# Altium PCB JacdacTopologyHubEc30 126.PcbDoc
Units mm, origin at the board's own origin, x right, y up, seen from the top; angles counter-clockwise.
Board outline 18 x 45 mm, 2 copper layers (Top Layer, Bottom Layer), stack 1.525 mm thick; 31 components, 20 nets, 135 pads, 9 vias.
Unrouted connection lines stored in the file: 41.
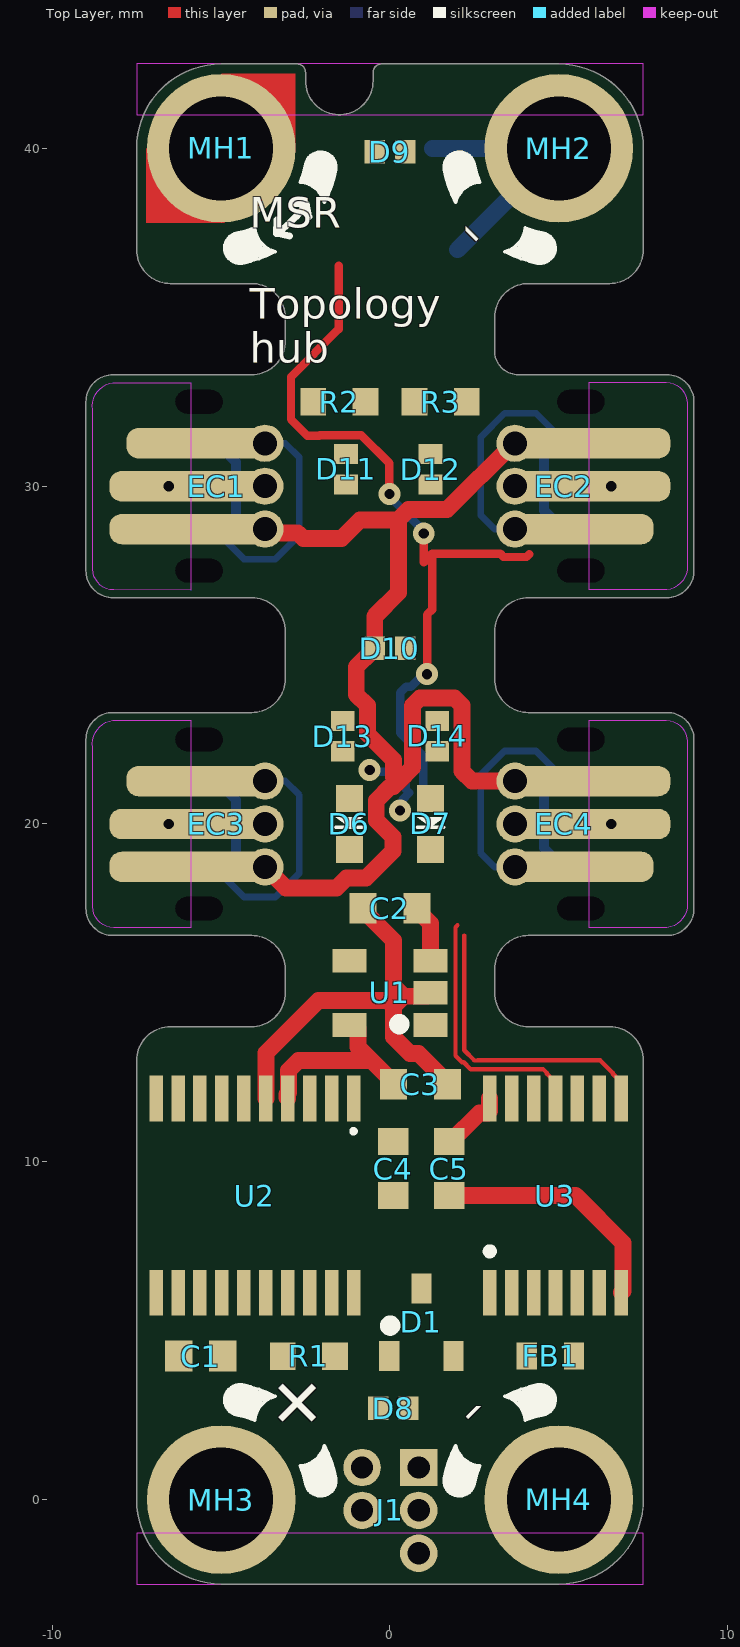
[diagram p0: Top Layer view]
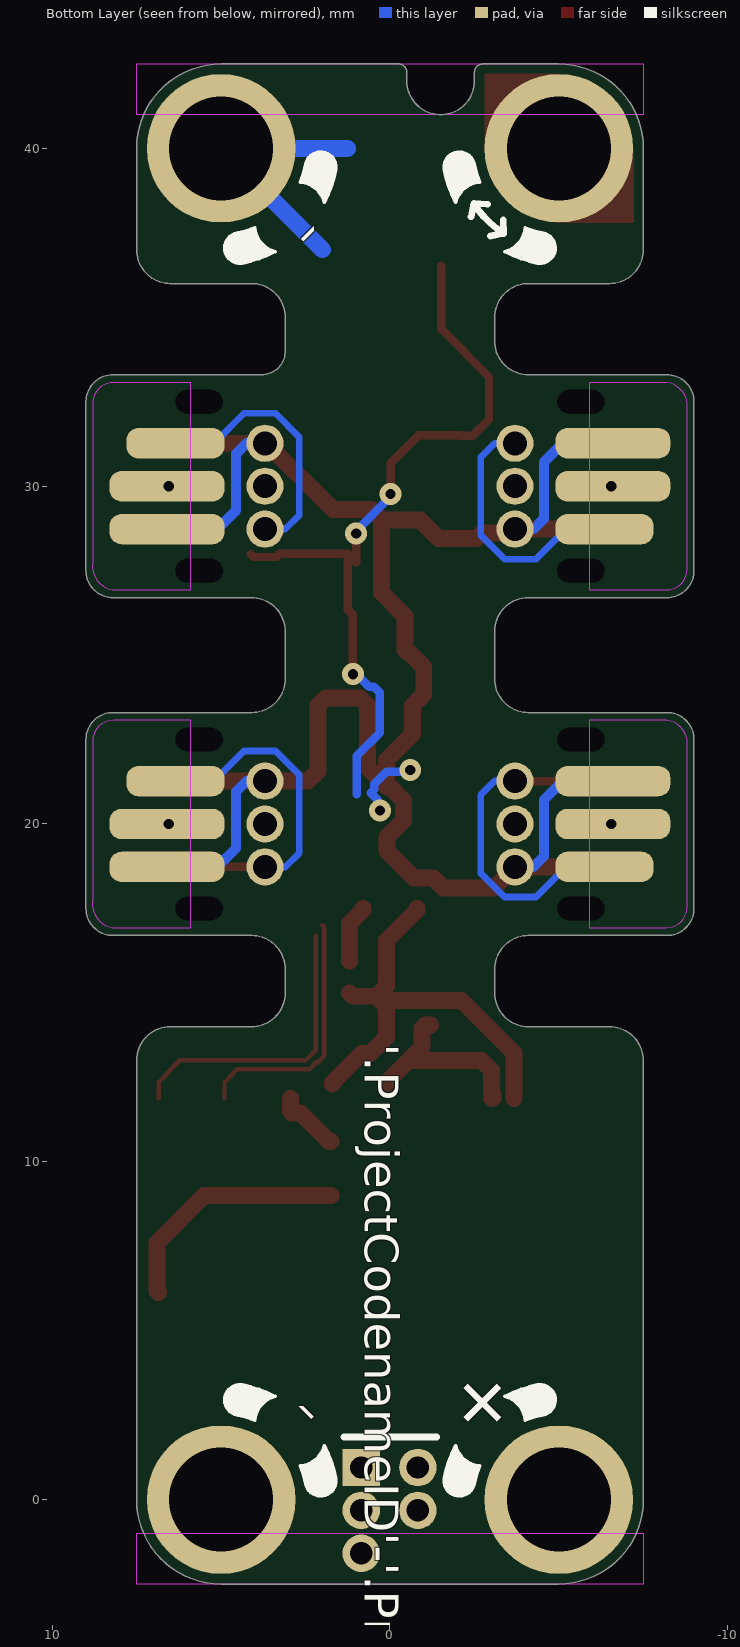
[diagram p1: Bottom Layer view, seen from below]

## Layer stack, top to bottom
Top Solder: solder mask 0.0102, Solder Resist, Dk 3.5
Top Layer: signal copper 0.0356
Dielectric 1: core 1.454, FR-4, Dk 4.2
Bottom Layer: signal copper 0.0356
Bottom Solder: solder mask 0.0102, Solder Resist, Dk 3.5

## Board outline
-7.5,13 cw(c-6.5,13) -6.5,14 -4.1,14 ccw(c-4.1,15) -3.1,15 -3.1,15.7 ccw(c-4.1,15.7) -4.1,16.7 -8.2,16.7 cw(c-8.2,17.5) -9,17.5 -9,22.5 cw(c-8.2,22.5) -8.2,23.3 -4.1,23.3 -4.098,23.3 ccw(c-4.098,24.3) -3.098,24.3 -3.1,24.3 -3.1,25.7 ccw(c-4.1,25.7) -4.1,26.7 -8.2,26.7 cw(c-8.2,27.5) -9,27.5 -9,32.5 cw(c-8.2,32.5) -8.2,33.3 -4.1,33.3 -4.098,33.3 ccw(c-4.098,34.3) -3.098,34.3 -3.1,34.3 -3.1,35 ccw(c-4.1,35) -4.1,36 -6.5,36 cw(c-6.5,37) -7.5,37 -7.5,36.97 -7.5,40 cw(c-5,40) -5,42.5 -2.75,42.5 cw(c-2.75,42.25) -2.5,42.25 -2.5,42 ccw(c-1.5,42) -0.5,42 -0.5,42.25 cw(c-0.25,42.25) -0.25,42.5 5,42.5 cw(c5,40) 7.5,40 7.5,36.97 7.5,37 cw(c6.5,37) 6.5,36 4.1,36 ccw(c4.1,35) 3.1,35 3.099,33.999 ccw(c3.797,33.999) 3.797,33.301 8.2,33.3 cw(c8.2,32.5) 9,32.5 9,27.5 cw(c8.2,27.5) 8.2,26.7 4.1,26.7 ccw(c4.1,25.7) 3.1,25.7 3.1,24.3 3.098,24.3 ccw(c4.098,24.3) 4.098,23.3 4.1,23.3 8.2,23.3 cw(c8.2,22.5) 9,22.5 9,17.5 cw(c8.2,17.5) 8.2,16.7 4.1,16.7 ccw(c4.1,15.7) 3.1,15.7 3.1,15 ccw(c4.1,15) 4.1,14 6.5,14 cw(c6.5,13) 7.5,13 7.5,0 cw(c5,0) 5,-2.5 -5,-2.5 cw(c-5,0) -7.5,0

## Design rules (kind name [scope] priority, off if disabled: settings)
AssemblyTestPointUsage [All] p1: valid=2
BoardOutlineClearance [not (HasFootprint('MOUSEBITE_CONNECTOR_3X2') or HasFootprint('MOUSEBITE_NOCONNECTOR_3'))] p1: gap=0.3 ignorepadtopadclearanceinfootprint=FALSE except(0: Arc-SplitContinuation Track-SplitContinuation SMDPad-SplitContinuation THPad-SplitContinuation Via-SplitContinuation Fill-SplitContinuation Poly-SplitContinuation Text-OutlineEdge Text-CavityEdge Text-CutoutEdge Text-SplitBarrior Text-SplitContinuation; 0.15: Region-OutlineEdge Region-CavityEdge Region-CutoutEdge Region-SplitBarrior Region-SplitContinuation)
Clearance "Clearance MH" [InComponent('MH1') OR InComponent('MH2') OR InComponent('MH3') OR InComponent('MH4')] p1: gap=0.15 ignorepadtopadclearanceinfootprint=FALSE except(0.254: Arc-Hole Track-Hole SMDPad-Hole THPad-Hole Via-Hole Fill-Hole Poly-Hole Region-Hole Text-Hole; 0.8: Arc-Fill Arc-Poly Arc-Region Track-Fill Track-Poly Track-Region SMDPad-Fill SMDPad-Poly SMDPad-Region THPad-Fill THPad-Poly THPad-Region Via-Fill Via-Poly Via-Region Fill-Fill Fill-Poly Fill-Region Poly-Poly Poly-Region Region-Region)
Clearance [All] p2: gap=0.13 ignorepadtopadclearanceinfootprint=FALSE except(0.25: Arc-Hole Track-Hole SMDPad-Hole THPad-Hole Via-Hole Fill-Hole Poly-Hole Region-Hole Text-Hole)
ComponentClearance "ComponentClearance MH" [InComponent('MH1') OR InComponent('MH2') OR InComponent('MH3') OR InComponent('MH4') vs InComponent('J1')] p1: gap=0 collisioncheckmode=3 verticalgap=0 showdistances=FALSE donotcheckwithout3dbody=TRUE
ComponentClearance [All] p2: gap=0.01 collisioncheckmode=3 verticalgap=0.2 showdistances=FALSE
DiffPairsRouting [All] p1: maxlimit=2 minlimit=0.15 mostfreqgap=0.15 toplayer_minwidth=0.15 toplayer_maxwidth=2 toplayer_prefwidth=0.15 bottomlayer_minwidth=0.15 bottomlayer_maxwidth=2 bottomlayer_prefwidth=0.15 substack1={CB9D278B-8BF5-444A-AAF4-837A2A9DF42D} toplayer_{cb9d278b-8bf5-444a-aaf4-837a2a9df42d}_minwidth=0.381 toplayer_{cb9d278b-8bf5-444a-aaf4-837a2a9df42d}_maxwidth=0.381 toplayer_{cb9d278b-8bf5-444a-aaf4-837a2a9df42d}_prefwidth=0.381 bottomlayer_{cb9d278b-8bf5-444a-aaf4-837a2a9df42d}_minwidth=0.381 bottomlayer_{cb9d278b-8bf5-444a-aaf4-837a2a9df42d}_maxwidth=0.381 bottomlayer_{cb9d278b-8bf5-444a-aaf4-837a2a9df42d}_prefwidth=0.381 substack2={826B8647-A721-4255-895A-19F9591B9CD1} toplayer_{826b8647-a721-4255-895a-19f9591b9cd1}_minwidth=0.381 toplayer_{826b8647-a721-4255-895a-19f9591b9cd1}_maxwidth=0.381 toplayer_{826b8647-a721-4255-895a-19f9591b9cd1}_prefwidth=0.381 bottomlayer_{826b8647-a721-4255-895a-19f9591b9cd1}_minwidth=0.381 bottomlayer_{826b8647-a721-4255-895a-19f9591b9cd1}_maxwidth=0.381 bottomlayer_{826b8647-a721-4255-895a-19f9591b9cd1}_prefwidth=0.381 substack3={E64FCAF4-1BC8-437D-B1E0-0E5F2DC0F59E} toplayer_{e64fcaf4-1bc8-437d-b1e0-0e5f2dc0f59e}_minwidth=0.381 toplayer_{e64fcaf4-1bc8-437d-b1e0-0e5f2dc0f59e}_maxwidth=0.381 toplayer_{e64fcaf4-1bc8-437d-b1e0-0e5f2dc0f59e}_prefwidth=0.381 bottomlayer_{e64fcaf4-1bc8-437d-b1e0-0e5f2dc0f59e}_minwidth=0.381 bottomlayer_{e64fcaf4-1bc8-437d-b1e0-0e5f2dc0f59e}_maxwidth=0.381 bottomlayer_{e64fcaf4-1bc8-437d-b1e0-0e5f2dc0f59e}_prefwidth=0.381 substack4={E61CE66C-507C-4E1E-8E83-C905434AFC1C} toplayer_{e61ce66c-507c-4e1e-8e83-c905434afc1c}_minwidth=0.381 toplayer_{e61ce66c-507c-4e1e-8e83-c905434afc1c}_maxwidth=0.381 toplayer_{e61ce66c-507c-4e1e-8e83-c905434afc1c}_prefwidth=0.381 bottomlayer_{e61ce66c-507c-4e1e-8e83-c905434afc1c}_minwidth=0.381 bottomlayer_{e61ce66c-507c-4e1e-8e83-c905434afc1c}_maxwidth=0.381 bottomlayer_{e61ce66c-507c-4e1e-8e83-c905434afc1c}_prefwidth=0.381 maxuncoupledlength=25
FabricationTestPointUsage [All] p1: valid=2 allowmultiple=FALSE
HoleSize [All] p1: absolutevalues=TRUE maxlimit=5 minlimit=0.3 maxpercent=80.000 minpercent=20.000
HoleToHoleClearance [IsPad and not (HasFootprint('MOUSEBITE_CONNECTOR_3X2') or HasFootprint('MOUSEBITE_NOCONNECTOR_3')) vs IsPad and not  (HasFootprint('MOUSEBITE_CONNECTOR_3X2') or HasFootprint('MOUSEBITE_NOCONNECTOR_3'))] p1: gap=0.5 allowstackedmicrovias=TRUE
MinimumAnnularRing [All] p1: minimumring=0.15
MinimumSolderMaskSliver [All] p1: minsoldermaskwidth=0.005
PlaneClearance [All] p1: clearance=0.3
PlaneConnect [All] p1: planeconnectstyle=Relief reliefexpansion=0.5 reliefentries=4 reliefconductorwidth=0.3 reliefairgap=0.3
PolygonConnect "PolygonConnect MH" [InComponent('MH1') OR InComponent('MH2') OR InComponent('MH3') OR InComponent('MH4')] p1: connectstyle=Relief reliefconductorwidth=0.5 reliefentries=4 polygonreliefangle="90 Angle" airgapwidth=0.8
PolygonConnect [All] p2: connectstyle=Relief reliefconductorwidth=0.2 reliefentries=4 polygonreliefangle="90 Angle" airgapwidth=0.2
RoutingVias [All] p1: holewidth=0.3 width=0.6 viastyle="Through Hole" minholewidth=0.3 minwidth=0.6 maxholewidth=0.3 maxwidth=0.8
SilkToSilkClearance [All] p1: silktosilkclearance=0.001
SilkToSolderMaskClearance [IsPad] p1: minsilkscreentomaskgap=0.05 clearancetoexposedcopper=TRUE
SolderMaskExpansion [All] p1: expansion=0.075 istentingtop=FALSE
UnRoutedNet [All] p1: checkbadconnections=TRUE
Width [All] p1: maxlimit=2 minlimit=0.13 preferedwidth=0.13 substack1={CB9D278B-8BF5-444A-AAF4-837A2A9DF42D} toplayer_{cb9d278b-8bf5-444a-aaf4-837a2a9df42d}_minwidth=0.15 toplayer_{cb9d278b-8bf5-444a-aaf4-837a2a9df42d}_prefwidth=0.15 bottomlayer_{cb9d278b-8bf5-444a-aaf4-837a2a9df42d}_minwidth=0.15 bottomlayer_{cb9d278b-8bf5-444a-aaf4-837a2a9df42d}_prefwidth=0.15 substack2={826B8647-A721-4255-895A-19F9591B9CD1} toplayer_{826b8647-a721-4255-895a-19f9591b9cd1}_minwidth=0.15 toplayer_{826b8647-a721-4255-895a-19f9591b9cd1}_prefwidth=0.15 bottomlayer_{826b8647-a721-4255-895a-19f9591b9cd1}_minwidth=0.15 bottomlayer_{826b8647-a721-4255-895a-19f9591b9cd1}_prefwidth=0.15 substack3={E64FCAF4-1BC8-437D-B1E0-0E5F2DC0F59E} toplayer_{e64fcaf4-1bc8-437d-b1e0-0e5f2dc0f59e}_minwidth=0.15 toplayer_{e64fcaf4-1bc8-437d-b1e0-0e5f2dc0f59e}_prefwidth=0.15 bottomlayer_{e64fcaf4-1bc8-437d-b1e0-0e5f2dc0f59e}_minwidth=0.15 bottomlayer_{e64fcaf4-1bc8-437d-b1e0-0e5f2dc0f59e}_prefwidth=0.15 substack4={E61CE66C-507C-4E1E-8E83-C905434AFC1C} toplayer_{e61ce66c-507c-4e1e-8e83-c905434afc1c}_minwidth=0.15 toplayer_{e61ce66c-507c-4e1e-8e83-c905434afc1c}_prefwidth=0.15 bottomlayer_{e61ce66c-507c-4e1e-8e83-c905434afc1c}_minwidth=0.15 bottomlayer_{e61ce66c-507c-4e1e-8e83-c905434afc1c}_prefwidth=0.15 minimp=50.000000 maximp=50.000000 favimp=50.000000
18 further rules are at their usual default settings.

## Components (designator, comment, footprint, x,y, rotation, side; value= is the part's Value field where it differs from the comment)
C1 "33pF" CC0603 -5.6,4.25 r0 top
C2 "1uF 16V" "C0603 - without outline" 0,17.5 r0 top
C3 "1uF 16V" "C0603 - without outline" 0.9,12.3 r180 top
C4 "1uF 16V" "C0603 - without outline" 0.1,9.8 r90 top
C5 "1uF 16V" "C0603 - without outline" 1.75,9.8 r90 top
D1 "BAT54S" "NXP-BAT54S-TO-236AB - without outline" 0.93,5.25 r90 top
D6 "Everlight Elec'''" "0603 Orange" -1.2,20 r90 top
D7 "Everlight Elec'''" "0603 Orange" 1.2,20 r90 top
D8 "RCLAMP0521P-N" "TVS 0402 - XL" 0.1,2.7 r0 top
D9 "RCLAMP0521P-N" "TVS 0402 - XL" 0,39.9 r0 top
D10 "RCLAMP0521P-N" "TVS 0402 - XL" 0,25.2 r0 top
D11 "RCLAMP0521P-N" "TVS 0402 - XL" -1.3,30.5 r270 top
D12 "RCLAMP0521P-N" "TVS 0402 - XL" 1.2,30.5 r90 top
D13 "RCLAMP0521P-N" "TVS 0402 - XL" -1.4,22.6 r90 top
D14 "RCLAMP0521P-N" "TVS 0402 - XL" 1.4,22.6 r90 top
EC1 "Jacdac edge connector" JACDAC_EDGE_CONNECTOR_TRACES_0.15MM -3.15,30 r90 top
EC2 "Jacdac edge connector" JACDAC_EDGE_CONNECTOR_TRACES_0.15MM 3.15,30 r270 top
EC3 "Jacdac edge connector" JACDAC_EDGE_CONNECTOR_TRACES_0.15MM -3.15,20 r90 top
EC4 "Jacdac edge connector" JACDAC_EDGE_CONNECTOR_TRACES_0.15MM 3.15,20 r270 top
FB1 "TDK MPZ1608S102ATA00" "TDK MPZ1608 0.8mm - without outline" 4.75,4.25 r180 top
J1 "Hack Connect Mini 1.27 mm pitch 2-row" HACK_CONNECT_MINI_5_X_1_27 0.85,0.95 r180 top
MH1 "MH_6.5MMK_4.5MMC_3.0MMD_PTH" MH_6.5MMK_4.5MMC_3.0MMD_PTH -5,40 r90 top
MH2 "MH_6.5MMK_4.5MMC_3.0MMD_PTH" MH_6.5MMK_4.5MMC_3.0MMD_PTH 5,40 r90 top
MH3 "MH_6.5MMK_4.5MMC_3.0MMD_PTH" MH_6.5MMK_4.5MMC_3.0MMD_PTH -5,0 r90 top
MH4 "MH_6.5MMK_4.5MMC_3.0MMD_PTH" MH_6.5MMK_4.5MMC_3.0MMD_PTH 5,0 r90 top
R1 "220R" RC0603 -2.4,4.25 r0 top
R2 "150R" RC0603 -1.5,32.5 r180 top
R3 "150R" RC0603 1.5,32.5 r0 top
U1 "3.3V LDO (see BOM)" MICRONE-SOT23-5 0,15 r180 top
U2 "STM32G030F6P6" "20-TSSOP - WITHOUT OUTLINE" -4,9 r270 top
U3 "" TSSOP-14 4.9,9 r90 top

## Footprints (in the part's own frame and the unit in brackets; to place one, negate y for a bottom-side part, rotate by r counter-clockwise, add the part's x,y. Pads: shape width x height; smd on the part's side, far side on the other; paste and mask are expansions set on the pad)
"20-TSSOP - WITHOUT OUTLINE" [mm]
  rect 1.35x0.4 smd: 1(-2.875,2.925) 2(-2.875,2.275) 3(-2.875,1.625) 4(-2.875,0.975) 5(-2.875,0.325) 6(-2.875,-0.325) 7(-2.875,-0.975) 8(-2.875,-1.625) 9(-2.875,-2.275) 10(-2.875,-2.925) 11(2.875,-2.925) 12(2.875,-2.275) 13(2.875,-1.625) 14(2.875,-0.975) 15(2.875,-0.325) 16(2.875,0.325) 17(2.875,0.975) 18(2.875,1.625) 19(2.875,2.275) 20(2.875,2.925)
  silkscreen extent -1.95,2.87 -1.86,2.97, body extent -3.3,-3.3 3.3,3.3, height 1.2
"0603 Orange" [mm]
  rect 0.8x0.8 smd paste-0.05: 1(-0.75,0) 2(0.75,0)
  silkscreen extent -0.1,-0.4 0.2,0.4, body extent -0.79,-0.4 0.81,0.4, height 0.4
"C0603 - without outline" [mm]
  rect 0.8x0.9 smd: 1(-0.8,0) 2(0.8,0)
  body extent -0.9,-0.5 0.9,0.5, height 0.9
CC0603 [mil]
  rect 32x36 smd: 1(-25.5,0) 2(25.5,0)
  body extent -34,-18 34,18, height 36
HACK_CONNECT_MINI_5_X_1_27 [mm]
  rect 1.11x1.11 hole 0.66: 1(0,0)
  round 1.11 hole 0.66: 2(1.676,0) 3(0,1.27) 4(1.676,1.27) 5(0,2.54)
JACDAC_EDGE_CONNECTOR_TRACES_0.15MM [mm] "Jacdac 3 pin connector with 0.15mm track-and-gap traces"
  rrect78% 0.9x2.9 smd far side paste-1 mask+0: 1(-1.27,3.2)
  rrect78% 0.9x4.3 smd paste-1 mask+0: 1(1.27,2.5)
  round 1.1 hole 0.71 paste-0.254 mask+0: 1(1.27,0.55) 2(0,0.55) 3(-1.27,0.55)
  rrect78% 0.9x3.4 smd far side paste-1 mask+0: 2(0,3.45) 2(0,3.45) 3(1.27,3.45)
  rrect78% 0.9x4.8 smd paste-1 mask+0: 2(0,2.75) 3(-1.27,2.75)
  round 0 hole 0.7 slot 1.4 at 90 deg unplated: ""(-2.5,2.5) ""(2.5,2.5)
  Top Layer keep-out region: -3.075,2.75 -3.07,5.033 -2.987,5.341 -2.761,5.567 -2.453,5.65 -2.453,5.65 2.27,5.65 2.545,5.635 2.794,5.516 2.978,5.31 3.07,5.05 3.07,5.05 3.07,2.75
  Bottom Layer lines w0.2: -1.27,3.175 -1.27,2.063 -2.159,1.174 -2.159,0.245 -1.448,-0.466 0.254,-0.466 0.854,-0.466 1.27,-0.05 1.27,0.55 ; -1.27,0.85 -1.126,0.85
  Bottom Layer lines w0.3: 1.27,1.962 0.713,1.405 -0.965,1.405 -1.27,1.1 -1.27,0.55
  Bottom Layer keep-out region: -3.07,2.75 -3.07,5.033 -3.023,5.269 -2.889,5.469 -2.689,5.603 -2.453,5.65 -2.453,5.65 2.27,5.65 2.546,5.635 2.794,5.516 2.978,5.31 3.07,5.05 3.07,5.05 3.07,2.75
MH_6.5MMK_4.5MMC_3.0MMD_PTH [mm] "Jacdac mounting hole 6.5mm clearance, 4.5 annualar ring and 3.0mm PTH"
  round 4.4 hole 3.08 mask+0.3: 1(0,0)
MICRONE-SOT23-5 [mm]
  rect 1x0.7 smd: 1(-1.2,0.95) 2(-1.2,0) 3(-1.2,-0.95) 4(1.2,-0.95) 5(1.2,0.95)
  silkscreen extent -0.33,0.88 -0.23,0.97, body extent -1.32,-1.5 1.32,1.5, height 1.11
"NXP-BAT54S-TO-236AB - without outline" [mm] "SOT23, 3-Leads, Body 2.90x2.30mm, Pitch 0.95mm, IPC Medium Density"
  rect 0.9x0.6 smd: 1(-1,0.95) 2(-1,-0.95) 3(1,0)
  silkscreen extent -0.15,0.87 -0.05,0.97, body extent -1.32,-1.5 1.32,1.5, height 1.12
RC0603 [mil]
  rect 30x32 smd: 1(-30.5,0) 2(30.5,0)
  body extent -31,-16 32,16, height 28
"TDK MPZ1608 0.8mm - without outline" [mm]
  rect 0.6x0.8 smd: 1(-0.7,0) 2(0.7,0)
  body extent -0.8,-0.4 0.8,0.4, height 0.8
TSSOP-14 [mm] "0.173\", 4.40mm Width"
  rect 1.35x0.4 smd: 1(-2.875,1.95) 2(-2.875,1.3) 3(-2.875,0.65) 4(-2.875,0) 5(-2.875,-0.65) 6(-2.875,-1.3) 7(-2.875,-1.95) 8(2.875,-1.95) 9(2.875,-1.3) 10(2.875,-0.65) 11(2.875,0) 12(2.875,0.65) 13(2.875,1.3) 14(2.875,1.95)
  silkscreen extent -1.74,1.86 -1.57,2.03, body extent -3.3,-2.37 3.3,2.33, height 1.2
"TVS 0402 - XL" [mm] "TVS 0402 RoHS"
  rect 0.6x0.7 smd paste-0.06 mask+0.05: 1(-0.45,0) 2(0.45,0)
  body extent -0.5,-0.3 0.5,0.3, height 0.5

## Part data
C1: library part CC0603JRNPO9BN330, "Cap 33PF 50V 0603 SMD 5% NP0", Case Code (Imperial)=0603, Case Code (Metric)=1608, Dielectric=C0G, Dielectric Material=Ceramic, Insulation Resistance=100GR, Manufacturer=Yageo, Max Operating Temperature=125°C, Min Operating Temperature=-55°C, Package Quantity=1, Supplier Part Number 1=311-1064-2-ND, Temperature Coefficient=30ppm/°C, Tolerance=5%, Voltage=50V, Capacitance=33pF, Case/Package=0603, Category="Ceramic Capacitors", ComponentLink1Description=https://datasheet.ciiva.com/11786/0900766b8079c870-11786082.pdf?src-supplier=RSComponents, ComponentLink1URL=https://datasheet.ciiva.com/11786/0900766b8079c870-11786082.pdf?src-supplier=RSComponents, ComponentLink2Description="Online part number coding", ComponentLink2URL=https://datasheet.ciiva.com/144/mlccorderingcode-144075.pdf?src-supplier=Digi-Key, ComponentLink3Description="Online datasheet", ComponentLink3URL=https://datasheet.ciiva.com/17434/upy-gphc-x7r-6-3v-to-50v-8-17434263.pdf, ComponentLink4Description="Online datasheet", ComponentLink4URL=https://datasheet.ciiva.com/26829/getdatasheetpartid-403577-26829431.pdf, ComponentLink5Description=https://datasheet.ciiva.com/26862/getdatasheetpartid-403532-26862767.pdf?src-supplier=Verical, ComponentLink5URL=https://datasheet.ciiva.com/26862/getdatasheetpartid-403532-26862767.pdf?src-supplier=Verical, ComponentLink6Description=https://datasheet.ciiva.com/8033/1443161-8033735.pdf?src-supplier=Element14, ComponentLink6URL=https://datasheet.ciiva.com/8033/1443161-8033735.pdf?src-supplier=Element14, ComponentLink7Description=https://datasheet.ciiva.com/7978/1443161-7978142.pdf?src-supplier=Element14, ComponentLink7URL=https://datasheet.ciiva.com/7978/1443161-7978142.pdf?src-supplier=Element14, ComponentLink8Description=https://datasheet.ciiva.com/46430/1835847-46430155.pdf?src-supplier=Element14, ComponentLink8URL=https://datasheet.ciiva.com/46430/1835847-46430155.pdf?src-supplier=Element14, ComponentLink9Description=https://datasheet.ciiva.com/144/mlccorderingcode-144644.pdf?src-supplier=Digi-Key, ComponentLink9URL=https://datasheet.ciiva.com/144/mlccorderingcode-144644.pdf?src-supplier=Digi-Key, ComponentLink10Description=https://datasheet.ciiva.com/144/mlccorderingcode-144643.pdf?src-supplier=Digi-Key, ComponentLink10URL=https://datasheet.ciiva.com/144/mlccorderingcode-144643.pdf?src-supplier=Digi-Key, ComponentLink11Description=https://datasheet.ciiva.com/144/mlccorderingcode-144645.pdf?src-supplier=Digi-Key, ComponentLink11URL=https://datasheet.ciiva.com/144/mlccorderingcode-144645.pdf?src-supplier=Digi-Key, ComponentLink12Description=https://datasheet.ciiva.com/5426/upy-gp-np0-16v-to-50v-8-5426614.pdf?src-supplier=Mouser, ComponentLink12URL=https://datasheet.ciiva.com/5426/upy-gp-np0-16v-to-50v-8-5426614.pdf?src-supplier=Mouser, ComponentLink13Description=https://datasheet.ciiva.com/8033/1372269-8033734.pdf?src-supplier=Element14, ComponentLink13URL=https://datasheet.ciiva.com/8033/1372269-8033734.pdf?src-supplier=Element14, ComponentLink14Description=https://datasheet.ciiva.com/11464/upy-gp-np0-16v-to-50v-8-11464730.pdf?src-supplier=Avnet, ComponentLink14URL=https://datasheet.ciiva.com/11464/upy-gp-np0-16v-to-50v-8-11464730.pdf?src-supplier=Avnet, Depth=0.8mm, Height=0.8mm, Lead Free="Lead Free", Length=1.6mm, Manufacturer 1=Yageo, Manufacturer Part Number=CC0603JRNPO9BN330, Manufacturer Part Number 1=CC0603JRNPO9BN330, Mount="Surface Mount", Number of Pins=2, Packaging="Tape and Reel", Pricing 1="4000=0.00888, 8000=0.00811 (USD)", Radiation Hardening=No, REACH SVHC="No SVHC", Resistor Type=Ceramic, RoHS=Yes, RoHS Compliant=Yes, Series=CC, Stock 1=422723, Supplier 1=Digi-Key, Supplier 2=Farnell, Supplier 3=RSComponents, Supplier 4=Mouser, Supplier 5=LCSC, Supplier Part Number 2=2408499, Supplier Part Number 3=2006492, Supplier Part Number 4=603-C0603JRNPO9BN330, Supplier Part Number 5=C107047, Termination=SMD/SMT, Thickness=0.035inch, Voltage Rating=50V, Voltage Rating (DC)=50V, Width=0.031inch
C2 C3 C4 C5: library part CL10A105KO8NNNC, "SMD Multilayer Ceramic Capacitor, 1 µF, 16 V, 0603 [1608 Metric], ± 10%, X5R, CL Series", Capacitance=1uF, Case Code (Imperial)=0603, Case Code (Metric)=1608, Dielectric=X5R, Manufacturer=Samsung, Max Operating Temperature=85°C, Min Operating Temperature=-55°C, Package Quantity=1, Supplier Part Number 1=1276-1034-1-ND, Tolerance=10%, Voltage=16V, Case/Package=0603, Category="Ceramic Capacitors", ComponentLink1Description="Online datasheet", ComponentLink1URL=https://datasheet.lcsc.com/lcsc/1811021622_Samsung-Electro-Mechanics-CL10A105KO8NNNC_C1592.pdfq, Construction=Flat, Contact Plating=Tin, Depth=0.8mm, Height=0.8mm, Lead Free="Lead Free", Length=1.6mm, Manufacturer 1=Samsung, Manufacturer Part Number=CL10A105KO8NNNC, Manufacturer Part Number 1=CL10A105KO8NNNC, Material=Ceramic, Mount="Surface Mount", Packaging="Tape and Reel", Pricing 1="1=0.10000, 10=0.03600, 50=0.01960, 100=0.01600, 500=0.01144, 1000=0.00898 (USD)", Radiation Hardening=No, RoHS=Yes, RoHS Compliant=Yes, Series=CL, Stock 1=3575337, Supplier 1=Digi-Key, Supplier 2=Farnell, Supplier 3=RSComponents, Supplier 4=Mouser, Supplier 5=LCSC, Supplier Part Number 2=3013384, Supplier Part Number 3=7664780, Supplier Part Number 4=187-CL10A105KO8NNNC, Supplier Part Number 5=C1592, Thickness=0.035inch, Voltage Rating=16V, Voltage Rating (DC)=16V, Width=0.031inch
D1: "DIODE ARRAY SCHOTTKY 30V SOT23", Manufacturer=Nexperia, Manufacturer Part Number=BAT54S,235, Supplier Part Number 1=1727-1868-1-ND, Category="Rectifier Diodes", ComponentLink1Description="NXP datasheet online", ComponentLink1URL=https://assets.nexperia.com/documents/data-sheet/BAT54_SER.pdf, Pricing 1="1=0.13000, 10=0.11900, 100=0.05610, 500=0.03326, 1000=0.02185, 5000=0.02138 (USD)", RoHS=No, Stock 1=14011, Supplier 1=Digi-Key, Supplier 2=Mouser, Supplier 3=RSComponents, Supplier Part Number 2=771-BAT54S235, Supplier Part Number 3=1707990
D6 D7: library part 19-217/S2C-AQ1R1B/3T, "LED ORANGE DIFFUSED 0603 SMD", Case Code (Imperial)=0603, Color=Orange, Manufacturer="Everlight Elec", Supplier Part Number 1=C146215, Case/Package=0603, Colour=Orange, ComponentLink1Description="Online datasheet", ComponentLink1URL=https://datasheet.lcsc.com/lcsc/1912171731_Everlight-Elec-19-217-S2C-AQ1R1B-3T_C146215.pdf, Manufacturer 1="Everlight Elec", Manufacturer Part Number=19-217/S2C-AQ1R1B/3T, Manufacturer Part Number 1=19-217/S2C-AQ1R1B/3T, Mount="Surface Mount", Supplier 1=LCSC
D8 D9 D10 D11: "Bidirectional 5V (Max) 6V 16V 3.5A (8/20us) 0402 TVS RoHS", Manufacturer="Born Semiconductor", Package=0402, Supplier Part Number 1=C316043, Checked By=?, ComponentLink1Description="Online datasheet", ComponentLink1URL=https://datasheet.lcsc.com/szlcsc/Bourne-Semicon-Shenzhen-RCLAMP0521P-N_C316043.pdf, Created By="D Gakure", Manufacturer 1="Born Semiconductor", Manufacturer Part Number=RCLAMP0521P-N, Manufacturer Part Number 1=RCLAMP0521P-N, Supplier 1=LCSC
D12 D13 D14: "Bidirectional 5V (Max) 6V 16V 3.5A (8/20us) 0402 TVS RoHS", Manufacturer="Born Semiconductor", Manufacturer Part Number="RCLAMP0521 (see BOM)", Package=0402, Supplier Part Number 1=C316043, Checked By=?, ComponentLink1Description="Online datasheet", ComponentLink1URL=https://datasheet.lcsc.com/szlcsc/Bourne-Semicon-Shenzhen-RCLAMP0521P-N_C316043.pdf, Created By="D Gakure", Manufacturer 1="Born Semiconductor", Manufacturer Part Number 1="RCLAMP0521 (see BOM)", Supplier 1=LCSC
EC1 EC2 EC3 EC4: "3 pin Jacdac edge connector 1.27mm pitch", Manufacturer Part Number=n/a, ComponentLink1Description="Yuliang JACDAC cable connector drawing online", ComponentLink1URL=https://github.com/microsoft/jacdac-ddk/tree/main/connector, ComponentLink2Description="JACDAC PCB edge connector spec onlin", ComponentLink2URL=https://github.com/microsoft/jacdac-ddk/tree/main/connector, Created By="D. Gakure & S. Hodges", PCB Type="1.6mm FR4"
FB1: "0603 1k@100MHz 0.8A chip", Case Code (Imperial)=0603, Case Code (Metric)=1608, Current Rating=800mA, DC Resistance (DCR)=300mR, Manufacturer=TDK, Manufacturer Part Number=MPZ1608S102ATA00, Package Quantity=4000, Supplier Part Number 1=445-8694-1-ND, Tolerance=25%, Case/Package=0603, ComponentLink2Description="datasheet online", ComponentLink2URL=https://www.mouser.co.uk/datasheet/2/400/eads_commercial_power_mpz1608_en-923650.pdf, ComponentLink3Description=datasheet, ComponentLink3URL="Y:\System\Altium\Libraries 2014\TDK\Datasheets\eads_commercial_power_mpz1608_en-923650.pdf", Core Material=Ferrite, Height=0.037inch, Impedance="1kR @ 100MHz", Length=0.063inch, Manufacturer 1=TDK, Manufacturer Part Number 1=MPZ1608S102ATA00, Max DC Current=800mA, Mount="Surface Mount", Packaging="Tape and Reel", Pricing 1="1=0.1, 10=0.079, 25=0.0716, 50=0.0644, 100=0.0472, 250=0.03432, 500=0.03146, 1000=0.02717 (USD)", Stock 1=113542, Supplier 1=Digi-Key, Supplier 2=Mouser, Supplier Part Number 2=810-MPZ1608S102ATA00, Width=0.031inch
J1: library part HACK_CONNECT_MINI
MH1 MH2 MH3 MH4: "Mounting Hole 6.5mm keepout, 4.5mm annualar ring and 3.0mm Drill PTH"
R1: library part RC0603FR-07220RL, "Res Thick Film 0603 220 Ohm 1% 0.1W(1/10W) ±100ppm/°C Pad SMD T/R", Case Code (Imperial)=0603, Case Code (Metric)=1608, Manufacturer="= Manufacturer 1", Manufacturer 1="=\"Manufacturer\"", Manufacturer Part Number="= Manufacturer Part Number 1", Manufacturer Part Number 1="=\"Manufacturer Part Number\"", Max Operating Temperature=155°C, Max Power Dissipation=100mW, Min Operating Temperature=-55°C, Package Quantity=1, Resistance Tolerance=1%, Resistor Type="Thick Film", Supplier Part Number 1=311-220HRCT-ND, Temperature Coefficient=100ppm/°C, Voltage Rating=50V, Case/Package=0603, Category="Chip SMD Resistors", ComponentLink4Description="online datasheet", ComponentLink4URL=https://datasheet.ciiva.com/46395/443971-46395002.pdf, Construction=Rectangular, Depth=0.8mm, Features="Moisture Resistant", Height=0.022inch, Lead Free="Lead Free", Length=1.6mm, Military Standard=Not, Number of Pins=2, Number of Terminations=2, Packaging="Tape and Reel", Power Rating=100mW, Pricing 1="1=0.10000, 10=0.02300, 100=0.00930, 1000=0.00417, 2500=0.00362 (USD)", REACH SVHC="No SVHC", Resistance=220R, RoHS=Yes, RoHS Compliant=Yes, Series=RC, Size Code=0603, Stock 1=1257522, Supplier 1=Digi-Key, Supplier 2=Farnell, Supplier 3=Mouser, Supplier 4=RSComponents, Supplier Part Number 2=2421863, Supplier Part Number 3=603-RC0603FR-07220RL, Supplier Part Number 4=1995497, Termination=SMD/SMT, Tolerance=1%, Voltage Rating (DC)=50V, Width=0.031inch
R2 R3: library part RC0603FR-07150RL, "Res General Purpose Thick Film 0603 150 Ohm 1% 1/10W ±100ppm/°C Molded SMD Paper T/R", Case Code (Imperial)=0603, Case Code (Metric)=1608, Manufacturer=Yageo, Max Operating Temperature=155°C, Max Power Dissipation=100mW, Min Operating Temperature=-55°C, Package Quantity=5000, Resistance Tolerance=1%, Resistor Type="Thick Film", Supplier Part Number 1=311-150HRCT-ND, Temperature Coefficient=100ppm/°C, Voltage Rating=50V, Case/Package=0603, Category="Chip SMD Resistors", ComponentLink1Description="Online datasheet", ComponentLink1URL=https://datasheet.ciiva.com/11819/0900766b80f96399-11819290.pdf, Construction=Rectangular, Depth=0.8mm, Features="Moisture Resistant", Height=0.45mm, Lead Free="Lead Free", Length=1.6mm, Manufacturer 1=Yageo, Manufacturer Part Number=RC0603FR-07150RL, Manufacturer Part Number 1=RC0603FR-07150RL, Military Standard=Not, Number of Pins=2, Number of Terminations=2, Packaging="Tape and Reel", Power Rating=100mW, Pricing 1="1=0.10000, 10=0.02400, 100=0.00970, 1000=0.00436, 2500=0.00378 (USD)", REACH SVHC="No SVHC", Resistance=150R, RoHS=Yes, RoHS Compliant=Yes, Series=RC, Size Code=0603, Stock 1=2262542, Supplier 1=Digi-Key, Supplier 2=Farnell, Supplier 3=RSComponents, Supplier 4=Mouser, Supplier 5=LCSC, Supplier Part Number 2=9238387, Supplier Part Number 3=1995464, Supplier Part Number 4=603-RC0603FR-07150RL, Supplier Part Number 5=C114608, Termination=SMD/SMT, Tolerance=1%, Voltage Rating (DC)=50V, Width=0.8mm
U1: library part ME6211C33M5G-N, "6V 260mV @ 200mA(typ) - - Fixed 3.3V SOT-23-5 Linear Voltage Regulators (LDO) ROHS", Case/Package=SOT-23-5, Dropout Voltage=200mV, Manufacturer="MICRONE(Nanjing Micro One Elec)", Max Input Voltage=6, Min Output Voltage=3.3V, Output Current=500mA, Supplier Part Number 1=C82942, Category="Voltage Regulators - Linear", Checked=?, ComponentLink3Description="On Semi datasheet online", ComponentLink3URL=https://datasheet.lcsc.com/lcsc/1811131510_MICRONE-Nanjing-Micro-One-Elec-ME6211C33M5G-N_C82942.pdf, Created=DG, Manufacturer 1="MICRONE(Nanjing Micro One Elec)", Manufacturer Part Number=ME6211C33M5G-N, Manufacturer Part Number 1=ME6211C33M5G-N, Mount="Surface Mount", Number of Regulators=1, Output Configuration=Positive, Output Type=Fixed, Pricing 1="1=0.33000, 10=0.24900, 25=0.21760, 100=0.12440, 250=0.11664, 500=0.09330, 1000=0.07153 (USD)", Stock 1=32529, Supplier 1=LCSC
U2: "ARM® Cortex®-M0+ series IC 64MHz 32KB 20-TSSOP", Manufacturer 1=STMicroelectronics, Supplier Part Number 1=497-STM32G030F6P6-ND, Supplier Part Number 10=C724040, Category=Microcontrollers, ComponentLink1Description="Online datasheet", ComponentLink1URL=https://www.st.com/resource/en/datasheet/stm32g030f6.pdf, ComponentLink2Description="Online reference manual", ComponentLink2URL=https://www.st.com/resource/en/reference_manual/rm0454-stm32g0x0-advanced-armbased-32bit-mcus-stmicroelectronics.pdf, Manufacturer Part Number 1=STM32G030F6P6, Pricing 1="1=1.85000, 10=1.65300, 74=1.56905, 148=1.28892, 296=1.20486, 444=1.06475, 962=0.93400 (USD)", RoHS=Yes, RoHS Compliant=Yes, Supplier 1=Digi-Key, Supplier 2=Farnell, Supplier 3=Mouser, Supplier 10=LCSC, Supplier Part Number 2=3294301, Supplier Part Number 3=511-STM32G030F6P6
U3: library part 74LV4066PW, "74LV Series 3.3 V SMT CMOS Low On Resistance Quad Bilateral Switch - TSSOP-14", Manufacturer 1="Nexperia USA", Supplier Part Number 1=1727-6665-1-ND, ComponentLink1Description="Online datasheet", ComponentLink1URL=https://assets.nexperia.com/documents/data-sheet/74LV4066.pdf, Manufacturer Part Number 1=74LV4066PW, RoHS=No, Supplier 1=Digi-Key

## Via types
v1: diameter 0.65, hole 0.3, Top Layer to Bottom Layer, tented both sides, 5 vias
v2: diameter 0.6, hole 0.3, Top Layer to Bottom Layer, tented both sides, 4 vias

## Nets (pads, with @x,y where several pads share a name; then routed paths per layer and width w, separated by ;. In a path a pad name is that pad's centre, name@x,y a point inside that pad or via, vN(x,y) a via of type N, cw(c..) or ccw(c..) an arc to the next point about the centre after c; other vN are vias at no path point)
3V3: C3.2 C4.2 D1.2 J1.1 U1.5 U2.4 | length 5.8
  Top Layer w0.5: U2.4 -3.045,11.895 -3.045,12 -3,12.045 -3,12.707 -2.707,13 -0.7,13 -0.625,13.075 ; U1.5 -1.05,14.05 -0.95,13.95 -0.95,13.4 -0.625,13.075 ; C3.2 0.1,12.35 -0.625,13.075
GND: C1.1 C2.1 C3.1 C4.1 C5.1 D1.1 D6.1 D7.1 D8.2 D9.2 D10.2 D11.2 D12.2 D13.2 D14.2 EC1.2 EC2.2 EC3.2 EC4.2 J1.3 MH2.1 MH4.1 U1.2 U2.5 U3.7 | length 28.5
  Top Layer w0.5: U2.5 -3.675,13.225 -2.12,14.78 -0.08,14.78 0.1,14.6 ; C2.1 -0.8,17.45 0.1,16.55 0.1,15.2 0.4,14.9 ; U1.2 1.1,14.9 0.4,14.9 ; C3.1 1.7,12.35 0.843,13.207 0.593,13.207 0.1,13.7 0.1,14.6 ; C5.1 5.5,9 6.9,7.6 6.9,6.175 U3.7 ; 0.1,14.6 0.4,14.9
  Bottom Layer w0.5: 1.25,40 MH2.1 2,37
  other v2: -6.55,20 6.55,20 -6.55,30 6.55,30
JD_DATA_1: D11.1 EC1.1 U3.1
JD_DATA_1_SEL: U2.1 U3.13
JD_DATA_2: D12.1 EC2.1 U3.4
JD_DATA_2_SEL: U2.12 U3.5
JD_DATA_3: D13.1 EC3.1 U3.8 | length 10.9
  Top Layer w0.13: 2.2,16.7 2.2,13.3 2.5,13 2.6,13 2.605,13.005 6.221,13.005 6.595,12.631 6.595,12.605 6.85,12.35 U3.8
  Top Layer w0.25: EC3.1@-5.65,21.27 EC3.1@-3.7,21.27
JD_DATA_3_SEL: U2.11 U3.6
JD_DATA_4: D14.1 EC4.1 U3.11 | length 9.6
  Top Layer w0.13: 2,17 1.94,16.94 1.94,13.136 2.131,12.945 2.181,12.945 2.386,12.74 2.664,12.74 2.669,12.745 4.531,12.745 4.645,12.631 4.645,12.605 4.9,12.35 U3.11
  Top Layer w0.25: EC4.1@3.7,18.73 EC4.1@5.65,18.73
JD_DATA_4_SEL: U2.3 U3.12
JD_DATA_COM: D9.1 FB1.1 MH1.1 U3.2 U3.3 U3.9 U3.10 | length 25.3
  Top Layer w0.25: -1.52,36.52 -1.52,34.648 -2.931,33.238 -2.931,31.98 -2.451,31.5 -2.089,31.5 -2.084,31.505 -0.844,31.505 -0.018,30.678 v1(-0.018,29.768) ; v1(1,28.6) 1,27.75 1.25,28 ; v1(1.1,24.435) 1.1,26.197 1.25,26.347 1.25,28 ; 4.125,27.989 4.042,27.905 3.358,27.905 3.263,28 1.25,28
  Bottom Layer w0.25: v1(-0.6,21.6) -0.545,21.545 0.1,21.545 0.47,21.176 0.47,21.022 0.568,20.923 0.377,20.731 0.377,20.476 v1(0.3,20.4) ; v1(-0.018,29.768) -0.018,29.693 1,28.675 v1(1,28.6) ; 0.987,20.887 0.987,22.013 0.3,22.7 0.3,23.886 0.477,24.063 0.62,24.063 0.992,24.435 v1(1.1,24.435)
JD_DATA_MCU: D1.3 R1.2 U2.20
JD_PWR: C2.2 C5.2 D8.1 D10.1 EC1.3 EC2.3 EC3.3 EC4.3 MH3.1 U1.1 U1.3 U3.14 | length 44.7
  Top Layer w0.5: EC3.3@-5.9,18.73 -3.7,18.73 -3.079,18.109 -1.578,18.109 -1.286,18.401 -0.712,18.401 0.088,19.201 0.088,19.615 -0.405,20.108 -0.405,20.692 0.008,21.105 0.108,21.105 0.25,21.247 ; EC1.3@-5.9,28.73 -3.7,28.73 -3.585,28.615 -2.731,28.615 -2.566,28.45 -1.434,28.45 -0.884,29 0.24,29 0.545,29.305 1.69,29.305 3.655,31.27 EC2.3@5.9,31.27 ; 0.25,28.99 0.25,26.85 -0.45,26.15 -0.45,25.15 -0.5,25.1 -0.55,25.1 -1,24.65 -1,23.837 -0.67,23.507 -0.67,22.667 0.105,21.892 0.105,21.392 0.25,21.247 ; C2.2 0.8,17.45 1.2,17.05 U1.3 ; C5.2 1.8,10.6 2.65,11.45 2.9,11.45 2.95,11.5 U3.14 ; EC4.3@5.9,21.27 3.7,21.27 2.423,21.27 2.13,21.563 2.13,23.507 1.907,23.73 0.893,23.73 0.67,23.507 0.67,21.667 0.25,21.247
JD_STATUS: R2.1 R3.1 U2.2
NetC1_2: C1.2 FB1.2 R1.1
NetD6_2: D6.2 R2.2
NetD7_2: D7.2 R3.2
nRESET: J1.5 U2.6
SWCLK: J1.4 U2.19
SWDIO: J1.2 U2.18
pads on no net: EC1. EC2. EC3. EC4. U1.4 U2.7 U2.8 U2.9 U2.10 U2.13 U2.14 U2.15 U2.16 U2.17

## Polygon pours and split planes (outlines as drawn)
no net on Fabrication notes "NONET_L-01_P-001" (hatched 45Degree grid 0.6 track 0.01): 9.497,13 2.987,13 2.989,37.01 3,37 9.5,37 9.489,37.01
no net on Fabrication notes "NONET_L-01_P-001" (hatched 45Degree grid 0.6 track 0.01): -9.497,13 -2.987,13 -2.989,37.01 -3,37 -9.5,37 -9.489,37.01
no net on Bottom Assy "NONET_L-01_P-001" (hatched 45Degree grid 0.3 track 0.01): -9,17.5 ccw(c-8.2,17.5) -8.2,16.7 -4.1,16.7 cw(c-4.1,15.7) -3.1,15.7 -3.1,15 cw(c-4.1,15) -4.1,14 -6.5,14 ccw(c-6.5,13) -7.5,13 -7.501,12.449 cw(c-5,10) -5,13.5 -2,13.5 -2,38.197 ccw(c-5,40) -1.65,41.015 -1.656,41.012 cw(c-1.5,42) -2.5,42 -2.5,42.25 ccw(c-2.75,42.25) -2.75,42.5 -2.729,42.5 -5,42.5 ccw(c-5,40) -7.5,40 -7.5,37.003 -7.5,37 ccw(c-6.5,37) -6.5,36 -4.1,36 cw(c-4.1,35) -3.1,35 -3.1,34.3 cw(c-4.1,34.3) -4.1,33.3 -8.2,33.3 ccw(c-8.2,32.5) -9,32.5 -9,27.5 ccw(c-8.2,27.5) -8.2,26.7 -4.1,26.7 cw(c-4.1,25.7) -3.1,25.7 -3.101,25.7 -3.102,24.3 -3.1,24.3 cw(c-4.1,24.3) -4.1,23.3 -8.2,23.3 ccw(c-8.2,22.5) -9,22.5
no net on Bottom Assy "NONET_L-01_P-001" (hatched 45Degree grid 0.3 track 0.01): 3.1,15 3.1,15.7 cw(c4.1,15.7) 4.1,16.7 8.2,16.7 ccw(c8.2,17.5) 9,17.5 9,22.5 ccw(c8.2,22.5) 8.2,23.3 4.1,23.3 cw(c4.1,24.3) 3.1,24.3 3.102,24.3 3.101,25.7 3.1,25.7 cw(c4.1,25.7) 4.1,26.7 8.2,26.7 ccw(c8.2,27.5) 9,27.5 9,32.5 ccw(c8.2,32.5) 8.2,33.3 4.1,33.3 cw(c4.1,34.3) 3.1,34.3 3.1,35 cw(c4.1,35) 4.1,36 6.5,36 ccw(c6.5,37) 7.5,37 7.5,37.003 7.5,40 ccw(c5,40) 5,42.5 2.021,42.5 -0.25,42.5 ccw(c-0.25,42.25) -0.5,42.25 -0.5,42 cw(c-1.5,42) -1.5,41 1.65,41 ccw(c5,39.986) 2,38.183 2,13.5 5,13.5 cw(c5,10) 7.501,12.449 7.5,13 ccw(c6.5,13) 6.5,14 4.1,14 cw(c4.1,15)
no net on Bottom Assy "NONET_L-01_P-001" (hatched 45Degree grid 0.3 track 0.01): -7.5,0 ccw(c-5,0) -5,-2.5 -2.729,-2.5 5,-2.5 ccw(c5,0) 7.5,0 7.5,2.448 7.501,2.448 ccw(c5,0) 1.646,-1 -1.646,-1 ccw(c-5,0) -7.501,2.449 -7.5,2.449
no net on Bottom Assy "NONET_L-01_P-001" (hatched 45Degree grid 0.15 track 0.01): -7.5,1.658 cw(c-5,0) -3.342,-2.5 -5,-2.5 cw(c-5,0) -7.5,0
no net on Bottom Assy "NONET_L-01_P-001" (hatched 45Degree grid 0.15 track 0.01): 3.342,-2.5 cw(c5,0) 7.5,1.658 7.5,0 cw(c5,0) 5,-2.5
no net on Bottom Assy "NONET_L-01_P-001" (hatched 45Degree grid 0.15 track 0.01): -7.5,38.342 ccw(c-5,40) -3.342,42.5 -5,42.5 ccw(c-5,40) -7.5,40
no net on Bottom Assy "NONET_L-01_P-001" (hatched 45Degree grid 0.15 track 0.01): 7.5,38.342 cw(c5,40) 3.342,42.5 5,42.5 cw(c5,40) 7.5,40

## Keep-outs
Keep-Out Layer:
  region: 7.5,-2.5 7.5,-1 -7.5,-1 -7.5,-2.5
  region: 7.5,41 7.5,42.5 -7.5,42.5 -7.5,41

## Other copper
Top Layer:
  region net JD_DATA_COM: -7.215,37.8 -4.9,37.8 -2.8,39.9 -2.8,42.215 -4.985,42.215 -7.215,39.985
  text "Top Layer" at -13.799,50.5 h1.7
Bottom Layer:
  pour cut-out: -5,-2.5 ccw(c-5,0) -2.5,0 ccw(c-5,0) -5,2.5 ccw(c-5,0) -7.5,0 ccw(c-5,0)
  pour cut-out: 5,-2.5 ccw(c5,0) 7.5,0 ccw(c5,0) 5,2.5 ccw(c5,0) 2.5,0 ccw(c5,0)
  pour cut-out: 5,37.5 ccw(c5,40) 7.5,40 ccw(c5,40) 5,42.5 ccw(c5,40) 2.5,40 ccw(c5,40)
  pour cut-out: -5,37.5 ccw(c-5,40) -2.5,40 ccw(c-5,40) -5,42.5 ccw(c-5,40) -7.5,40 ccw(c-5,40)
  text "Bottom Layer" at -13.8,49 h1.7

## Silkscreen, mask and mechanical layers (free items; w line width, h text height)
Top Overlay:
  lines w0.1: -4.374,3.393 cw(c-5,0) -3.399,3.056 ccw(c-3.206,2.28) -4.003,2.347 ; -4.374,36.607 ccw(c-5,40) -3.399,36.944 cw(c-3.206,37.72) -4.003,37.653 ; -4.352,3.388 ccw(c-4.446,2.948) -4.539,2.508 cw(c-5,0) -4.027,2.357 ; -4.352,36.612 cw(c-4.446,37.052) -4.539,37.492 ccw(c-5,40) -4.027,37.643 ; -2.653,0.997 ccw(c-2.72,1.794) -1.944,1.601 cw(c-5,0) -1.607,0.626 ; -2.653,39.003 cw(c-2.72,38.206) -1.944,38.399 ccw(c-5,40) -1.607,39.374 ; -2.643,0.973 cw(c-5,0) -2.492,0.461 ccw(c-2.052,0.554) -1.612,0.648 ; -2.643,39.027 ccw(c-5,40) -2.492,39.539 cw(c-2.052,39.446) -1.612,39.352 ; 1.607,0.626 cw(c5,0) 1.944,1.601 ccw(c2.72,1.794) 2.653,0.997 ; 1.607,39.374 ccw(c5,40) 1.944,38.399 cw(c2.72,38.206) 2.653,39.003 ; 1.612,0.648 ccw(c2.052,0.554) 2.492,0.461 cw(c5,0) 2.643,0.973 ; 1.612,39.352 cw(c2.052,39.446) 2.492,39.539 ccw(c5,40) 2.643,39.027 ; 4.003,2.347 ccw(c3.206,2.28) 3.399,3.056 cw(c5,0) 4.374,3.393 ; 4.003,37.653 cw(c3.206,37.72) 3.399,36.944 ccw(c5,40) 4.374,36.607 ; 4.027,2.357 cw(c5,0) 4.539,2.508 ccw(c4.446,2.948) 4.352,3.388 ; 4.027,37.643 ccw(c5,40) 4.539,37.492 cw(c4.446,37.052) 4.352,36.612
  lines w0.2: -3.352,37.884 -3.366,37.484 ; -2.973,37.408 -3.366,37.484 ; -2.883,38.345 -2.484,38.366 ; -2.401,37.975 -2.484,38.366 ; -3.366,37.484 ccw(c-5,40) -2.484,38.366
  lines w0.33: -4.1,2.555 cw(c-3.759,2.698) -3.685,3.06 ; -4.1,37.445 ccw(c-3.759,37.302) -3.685,36.94 ; -2.445,0.9 ccw(c-2.302,1.241) -1.94,1.315 ; -2.445,39.1 cw(c-2.302,38.759) -1.94,38.685 ; 1.94,1.315 ccw(c2.302,1.241) 2.445,0.9 ; 1.94,38.685 cw(c2.302,38.759) 2.445,39.1 ; 3.685,3.06 cw(c3.759,2.698) 4.1,2.555 ; 3.685,36.94 ccw(c3.759,37.302) 4.1,37.445
  lines w1: -4.43,2.945 cw(c-5,0) -4.285,2.914 ; -4.43,37.055 ccw(c-5,40) -4.285,37.086 ; -2.086,0.715 cw(c-5,0) -2.055,0.57 ; -2.086,39.285 ccw(c-5,40) -2.055,39.43 ; 2.055,0.57 cw(c5,0) 2.086,0.715 ; 2.055,39.43 ccw(c5,40) 2.086,39.285 ; 4.285,2.914 cw(c5,0) 4.43,2.945 ; 4.285,37.086 ccw(c5,40) 4.43,37.055
  text "-" at 3.643,38.146 h3.5 r135
  text "MSR" at -4.151,37.65 h0.9
  text "Topology" at -4.151,34.96 h0.9
  text "hub" at -4.151,33.65 h0.9
  text "-" at 3.146,1.357 h3.5 r45
  text "+" at -2.95,1.33 h2.8 r315
Bottom Overlay:
  lines w0.1: -4.374,3.393 cw(c-5,0) -3.399,3.056 ccw(c-3.206,2.28) -4.003,2.347 ; -4.374,36.607 ccw(c-5,40) -3.399,36.944 cw(c-3.206,37.72) -4.003,37.653 ; -4.352,3.388 ccw(c-4.446,2.948) -4.539,2.508 cw(c-5,0) -4.027,2.357 ; -4.352,36.612 cw(c-4.446,37.052) -4.539,37.492 ccw(c-5,40) -4.027,37.643 ; -2.653,0.997 ccw(c-2.72,1.794) -1.944,1.601 cw(c-5,0) -1.607,0.626 ; -2.653,39.003 cw(c-2.72,38.206) -1.944,38.399 ccw(c-5,40) -1.607,39.374 ; -2.643,0.973 cw(c-5,0) -2.492,0.461 ccw(c-2.052,0.554) -1.612,0.648 ; -2.643,39.027 ccw(c-5,40) -2.492,39.539 cw(c-2.052,39.446) -1.612,39.352 ; 1.607,0.626 cw(c5,0) 1.944,1.601 ccw(c2.72,1.794) 2.653,0.997 ; 1.607,39.374 ccw(c5,40) 1.944,38.399 cw(c2.72,38.206) 2.653,39.003 ; 1.612,0.648 ccw(c2.052,0.554) 2.492,0.461 cw(c5,0) 2.643,0.973 ; 1.612,39.352 cw(c2.052,39.446) 2.492,39.539 ccw(c5,40) 2.643,39.027 ; 4.003,2.347 ccw(c3.206,2.28) 3.399,3.056 cw(c5,0) 4.374,3.393 ; 4.003,37.653 cw(c3.206,37.72) 3.399,36.944 ccw(c5,40) 4.374,36.607 ; 4.027,2.357 cw(c5,0) 4.539,2.508 ccw(c4.446,2.948) 4.352,3.388 ; 4.027,37.643 ccw(c5,40) 4.539,37.492 cw(c4.446,37.052) 4.352,36.612
  lines w0.2: -3.352,37.884 -3.366,37.484 ; -2.973,37.408 -3.366,37.484 ; -2.883,38.345 -2.484,38.366 ; -2.401,37.975 -2.484,38.366 ; -3.366,37.484 ccw(c-5,40) -2.484,38.366
  lines w0.33: -4.1,2.555 cw(c-3.759,2.698) -3.685,3.06 ; -4.1,37.445 ccw(c-3.759,37.302) -3.685,36.94 ; -2.445,0.9 ccw(c-2.302,1.241) -1.94,1.315 ; -2.445,39.1 cw(c-2.302,38.759) -1.94,38.685 ; 1.94,1.315 ccw(c2.302,1.241) 2.445,0.9 ; 1.94,38.685 cw(c2.302,38.759) 2.445,39.1 ; 3.685,3.06 cw(c3.759,2.698) 4.1,2.555 ; 3.685,36.94 ccw(c3.759,37.302) 4.1,37.445
  lines w1: -4.43,2.945 cw(c-5,0) -4.285,2.914 ; -4.43,37.055 ccw(c-5,40) -4.285,37.086 ; -2.086,0.715 cw(c-5,0) -2.055,0.57 ; -2.086,39.285 ccw(c-5,40) -2.055,39.43 ; 2.055,0.57 cw(c5,0) 2.086,0.715 ; 2.055,39.43 ccw(c5,40) 2.086,39.285 ; 4.285,2.914 cw(c5,0) 4.43,2.945 ; 4.285,37.086 ccw(c5,40) 4.43,37.055
  text "Bottom Overlay" at -5.2,50.475 h1.7
  text "-" at 3.643,38.146 h3.5 r135
  text "'.ProjectCodenameID'-'.ProjectRevision'" at 0.75,13.5 h1 r90
  text "-" at 3.146,1.357 h3.5 r45
  text "+" at -2.95,1.33 h2.8 r315
Top Paste:
  text "Top Paste" at -5.199,49.068 h1.7
Bottom Paste:
  text "Bottom Paste" at -5.2,47.59 h1.7
Top Solder:
  text "Top Solder (resist)" at -5.199,46.268 h1.7
Bottom Solder:
  text "Bottom Solder (resist)" at -5.2,44.777 h1.7
Drill Guide:
  text "Drill Guide" at 8.225,46.265 h1.7
Dimension:
  circle w0.1: c5,0 r2.2
  circle w0.1: c-5,0 r3.5
  text "Dimension" at 8.225,47.565 h1.7
Fabrication notes:
  lines w0.01: -9.5,13 -3,13 ; -9.5,37 -3,37 ; -9.489,37.01 -9.487,13 ; 2.987,13 2.989,37.01 ; 3,13 9.5,13 ; 3,37 9.5,37 ; 9.487,13 9.489,37.01
  lines w0.1: -7.4,27.5 -6.9,27.5 -5.65,27.5 ; -7.4,32.5 -6.9,32.5 -5.65,32.5 ; 5.65,27.5 6.9,27.5 7.4,27.5 ; 5.65,32.5 6.9,32.5 7.4,32.5
  lines w0.2: -11.25,19.8 -7.4,17.5 -5.65,17.5 ; -11.25,20.2 -7.4,22.5 -5.65,22.5 ; -11.25,29.8 -7.4,27.5 -5.65,27.5 ; -11.25,30.2 -7.4,32.5 -5.65,32.5 ; -11.25,36 -9.5,36 ; 5.65,17.5 7.4,17.5 11.25,19.8 ; 5.65,22.5 7.4,22.5 11.25,20.2 ; 5.65,27.5 7.4,27.5 11.25,29.8 ; 5.65,32.5 7.4,32.5 11.25,30.2 ; 9.5,36 11.25,36
  text "Fabrication Notes" at 8.225,50.465 h1.7
  text "no board edge pips/ / rat's teeth/mouse bites  / in this region - make  / sure board edge is clean" at -27.397,34 h1.7
  text "no board edge pips/ / rat's teeth/mouse bites  / in this region - make  / sure board edge is clean" at 11.6,34 h1.7
  text "non-plated slots x2" at -22.299,29.593 h1.7
  text "non-plated slots x2" at 11.679,29.593 h1.7
  text "non-plated slots x2" at -22.299,19.593 h1.7
  text "non-plated slots x2" at 11.679,19.593 h1.7
Top Component Center:
  lines w0.2: -1.7,30 -0.7,30 ; -1.2,29.5 -1.2,30.5
Alignment:
  circle w0.1: c5,40 r2.5
Board Outline:
  lines w0.2: -7.5,36.97 -7.5,40 cw(c-5,40) -5,42.5 -2.75,42.5 cw(c-2.75,42.25) -2.5,42.25 -2.5,42 ccw(c-1.5,42) -0.5,42 -0.5,42.25 cw(c-0.25,42.25) -0.25,42.5 5,42.5 cw(c5,40) 7.5,40 7.5,36.97 ; -7.5,37 ccw(c-6.5,37) -6.5,36 -4.1,36 cw(c-4.1,35) -3.1,35 -3.1,34.3 ; -4.1,16.7 -8.2,16.7 cw(c-8.2,17.5) -9,17.5 -9,22.5 cw(c-8.2,22.5) -8.2,23.3 -4.1,23.3 ; -4.1,26.7 -8.2,26.7 cw(c-8.2,27.5) -9,27.5 -9,32.5 cw(c-8.2,32.5) -8.2,33.3 -4.1,33.3 ; -4.1,16.7 cw(c-4.1,15.7) -3.1,15.7 -3.1,15 cw(c-4.1,15) -4.1,14 -6.5,14 ccw(c-6.5,13) -7.5,13 -7.5,0 ccw(c-5,0) -5,-2.5 5,-2.5 ccw(c5,0) 7.5,0 7.5,13 ccw(c6.5,13) 6.5,14 4.1,14 cw(c4.1,15) 3.1,15 3.1,15.7 cw(c4.1,15.7) 4.1,16.7 8.2,16.7 ; -4.1,26.7 cw(c-4.1,25.7) -3.1,25.7 -3.1,24.3 ; -4.098,23.3 ccw(c-4.098,24.3) -3.098,24.3 ; -4.098,33.3 ccw(c-4.098,34.3) -3.098,34.3 ; 3.098,24.3 ccw(c4.098,24.3) 4.098,23.3 ; 3.1,24.3 3.1,25.7 cw(c4.1,25.7) 4.1,26.7 8.2,26.7 ; 4.1,23.3 8.2,23.3 cw(c8.2,22.5) 9,22.5 9,17.5 cw(c8.2,17.5) 8.2,16.7 ; 7.5,37 cw(c6.5,37) 6.5,36 4.1,36 ccw(c4.1,35) 3.1,35 3.099,33.999 ccw(c3.797,33.999) 3.797,33.301 8.2,33.3 cw(c8.2,32.5) 9,32.5 9,27.5 cw(c8.2,27.5) 8.2,26.7
  text "Board Outline" at 8.225,49.065 h1.7
Top Assy:
  text "Top Assy" at -13.799,47.675 h1.7
Bottom Assy:
  text "Bottom Assy" at -13.8,46.275 h1.7
Drill Drawing:
  text "Drill Drawing" at 8.225,44.76 h1.7
Assembly Notes:
  lines w0.05: -7.504,2.969 -2.15,2.969 -2.15,17.031 -7.504,17.031 -7.504,2.969
Component Keepout Dwg:
  lines w0.01: -7.5,13 cw(c-6.5,13) -6.5,14 -4.1,14 ccw(c-4.1,15) -3.1,15 -3.1,15.7 ccw(c-4.1,15.7) -4.1,16.7 -8.2,16.7 cw(c-8.2,17.5) -9,17.5 -9,22.5 cw(c-8.2,22.5) -8.2,23.3 -4.1,23.3 ccw(c-4.1,24.3) -3.1,24.3 ; -7.5,37 ccw(c-6.5,37) -6.5,36 -4.1,36 cw(c-4.1,35) -3.1,35 -3.1,34.3 cw(c-4.1,34.3) -4.1,33.3 -8.2,33.3 ccw(c-8.2,32.5) -9,32.5 -9,27.5 ccw(c-8.2,27.5) -8.2,26.7 -4.1,26.7 cw(c-4.1,25.7) -3.1,25.7 ; -3.102,24.3 -3.101,25.7 ; 3.1,24.3 ccw(c4.1,24.3) 4.1,23.3 8.2,23.3 cw(c8.2,22.5) 9,22.5 9,17.5 cw(c8.2,17.5) 8.2,16.7 4.1,16.7 ccw(c4.1,15.7) 3.1,15.7 3.1,15 ccw(c4.1,15) 4.1,14 6.5,14 cw(c6.5,13) 7.5,13 ; 3.1,25.7 cw(c4.1,25.7) 4.1,26.7 8.2,26.7 ccw(c8.2,27.5) 9,27.5 9,32.5 ccw(c8.2,32.5) 8.2,33.3 4.1,33.3 cw(c4.1,34.3) 3.1,34.3 3.1,35 cw(c4.1,35) 4.1,36 6.5,36 ccw(c6.5,37) 7.5,37 ; 3.102,24.3 3.101,25.7
  lines w0.02: -7.501,12.449 -7.5,13 ; -5,13.5 -2,13.5 ; 2,13.5 5,13.5 ; 7.5,13 7.501,12.449
  lines w0.025: -7.501,2.449 cw(c-5,0) -1.646,-1 1.646,-1 cw(c5,0) 7.501,2.448 ; -7.5,2.449 -7.5,0 ccw(c-5,0) -5,-2.5 -2.729,-2.5 5,-2.5 ccw(c5,0) 7.5,0 7.5,2.448 ; -7.501,12.449 cw(c-5,10) -5,13.5 ; -7.5,37.003 -7.5,40 cw(c-5,40) -5,42.5 -2.729,42.5 ; -2.75,42.5 cw(c-2.75,42.25) -2.5,42.25 -2.5,42 ccw(c-1.5,42) -1.656,41.012 ; -2,13.5 -2,38.197 ccw(c-5,40) -1.65,41.015 ; 2,13.5 2,38.197 ; 2,38.183 cw(c5,39.986) 1.65,41 -1.5,41 ccw(c-1.5,42) -0.5,42 -0.5,42.25 cw(c-0.25,42.25) -0.25,42.5 2.021,42.5 5,42.5 cw(c5,40) 7.5,40 7.5,37.003 ; 5,13.5 cw(c5,10) 7.501,12.449

## Text inside footprints (layer, text, board x,y; h text height)
EC1: Mechanical 9 "Jacdac / cable connector  / body" at -13.158,25.179 h1.7 r90
EC2: Mechanical 9 "Jacdac / cable connector  / body" at 13.158,34.821 h1.7 r270
EC3: Mechanical 9 "Jacdac / cable connector  / body" at -13.158,15.179 h1.7 r90
EC4: Mechanical 9 "Jacdac / cable connector  / body" at 13.158,24.821 h1.7 r270